# Allegro board A523_REF_LPDDR3_256ball_64X1_6L_V3_1-C0201_0828_1705.brd
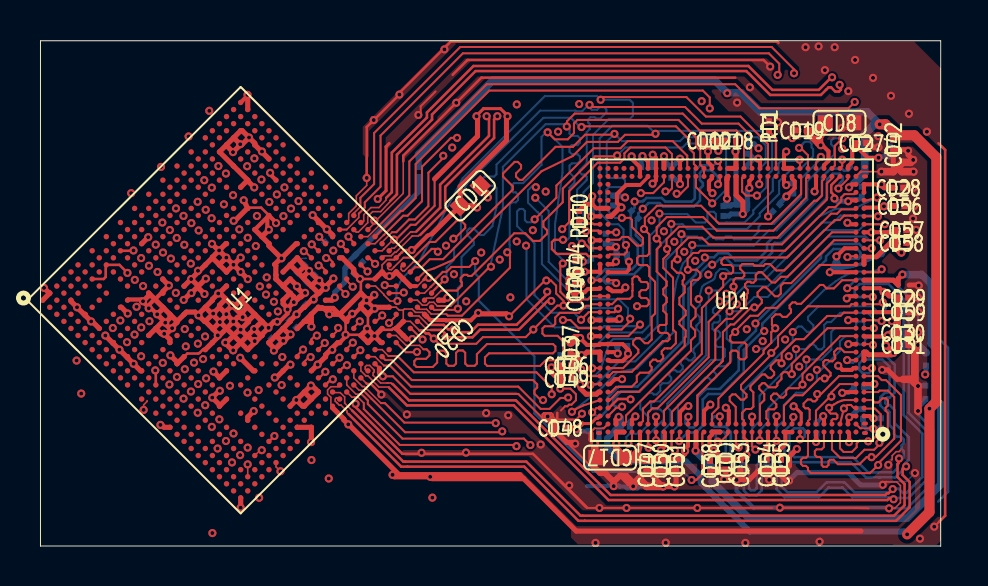
[diagram p0: board, top side]
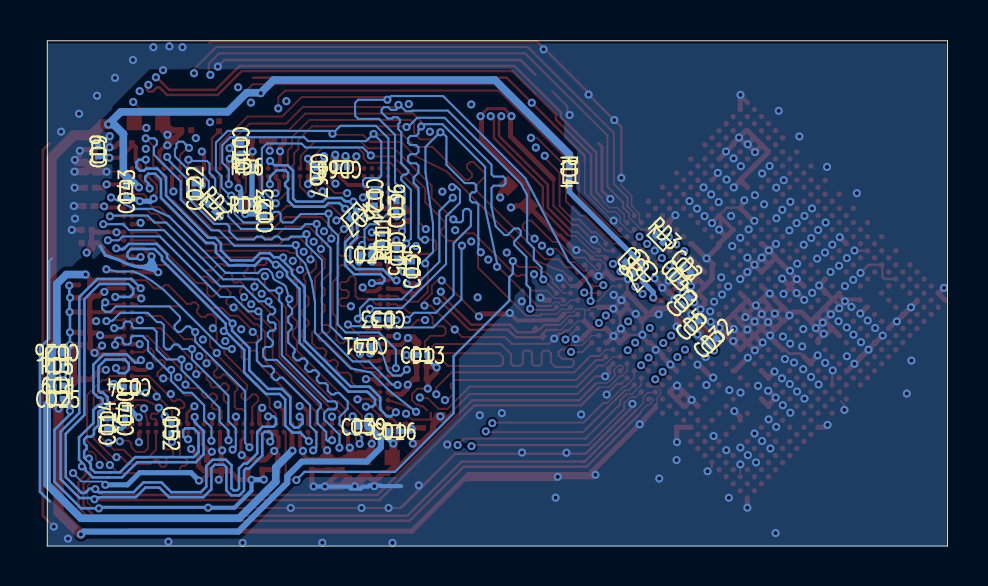
[diagram p1: board, bottom side, seen from below]

Outline 45.01 x 25.3 mm; copper layers: TOP, ART02, ART03, ART04, ART05, BOTTOM. Coordinates in mm from the lower left corner of the outline.
Outline path: 0,25.3 0,0 45.01,0 45.01,25.3 0,25.3

## Design rules (mm)
net group SA: nets SODT0 SODT2

## Placement (name value [footprint] x y rotation side)
CD1  10uF  [C0603]  21.49 17.54 225 top
CD2  2.2uF  [C0201]  13.03 13.87 225 bottom
CD3  NC/2.2uF  [C0201]  13.1 12.27 135 bottom
CD4  100nF  [C0201]  13.53 13.37 225 bottom
CD5  100nF  [C0201]  12.62 11.1 135 bottom
CD6  2.2uF  [C0201]  15.92 14.39 315 bottom
CD7  100nF  [C0201]  15.5 13.83 315 bottom
CD8  10uF  [C0603]  39.95 21.19 0 top
CD9  2.2uF  [C0201]  42.47 19.76 90 bottom
CD10  2.2uF  [C0201]  35.33 19.9 90 bottom
CD11  2.2uF  [C0201]  34.27 4.08 270 top
CD12  2.2uF  [C0201]  33.42 20.3 0 top
CD13  2.2uF  [C0201]  26.26 9.57 180 bottom
CD14  2.2uF  [C0201]  42.03 6.15 270 bottom
CD15  100nF  [C0201]  27.54 14.64 270 bottom
CD16  100nF  [C0201]  27.68 5.75 0 bottom
CD17  10uF  [C0603]  28.48 4.43 180 top
CD18  100nF  [C0201]  34.53 20.3 180 top
CD19  100nF  [C0201]  38.07 20.82 180 top
CD20  NC/2.2pF  [C0201]  20.41 10.67 225 top
CD21  2.2uF  [C0201]  28.64 17.3 90 bottom
CD22  100nF  [C0201]  37.64 17.91 270 bottom
CD23  100nF  [C0201]  34.15 16.78 270 bottom
CD24  2.2uF  [C0201]  29.07 14.59 180 bottom
CD25  100nF  [C0201]  44.49 7.37 180 bottom
CD26  2.2uF  [C0201]  44.53 9.68 180 bottom
CD27  100nF  [C0201]  41.04 20.18 0 top
CD28  100nF  [C0201]  42.89 17.94 0 top
CD29  100nF  [C0201]  43.14 12.43 0 top
CD30  100nF  [C0201]  43.12 10.67 0 top
CD31  100nF  [C0201]  43.14 10.07 0 top
CD32  100nF  [C0201]  11.73 10.22 135 bottom
CD33  100nF  [C0201]  28.22 11.34 0 bottom
CD34  100nF  [C0201]  40.93 7.96 180 bottom
CD35  100nF  [C0201]  26.78 14 90 bottom
CD36  100nF  [C0201]  27.56 17.02 90 bottom
CD37  100nF  [C0201]  26.51 9.92 90 top
CD38  100nF  [C0201]  33.48 4.02 270 top
CD39  100nF  [C0201]  29.22 5.98 0 bottom
CD40  100nF  [C0201]  41.13 6.62 270 bottom
CD41  100nF  [C0201]  29.09 10.02 0 bottom
CD42  100nF  [C0201]  42.64 20.1 270 top
CD43  100nF  [C0201]  41.07 17.74 270 bottom
CD44  100nF  [C0201]  26.75 14.03 90 top
CD45  100nF  [C0201]  26.73 12.86 90 top
CD46  100nF  [C0201]  26.3 9.05 180 top
CD47  100nF  [C0201]  30.29 4.06 270 top
CD48  100nF  [C0201]  25.98 5.92 180 top
CD49  100nF  [C0201]  26.3 8.37 180 top
CD50  100nF  [C0201]  31.01 4.03 270 top
CD51  100nF  [C0201]  31.79 4.06 270 top
CD52  100nF  [C0201]  38.81 5.89 90 bottom
CD53  100nF  [C0201]  35 4.06 270 top
CD54  100nF  [C0201]  36.31 4.06 270 top
CD55  100nF  [C0201]  37.02 4.06 270 top
CD56  100nF  [C0201]  42.95 17.03 0 top
CD57  100nF  [C0201]  43.05 15.83 0 top
CD58  100nF  [C0201]  43.05 15.18 0 top
CD59  100nF  [C0201]  43.14 11.71 0 top
CD67  100nF  [C0201]  31.54 18.69 270 bottom
CD68  100nF  [C0201]  30.28 18.98 0 bottom
NOREF  -  []  45.01 0 90 top
NOREF#2  -  []  0 25.3 0 top
RD1  240R-1%  [R0201]  36.42 21.02 270 top
RD2  240R-1%  [R0201]  36.8 16.93 225 bottom
RD3  120R-1%  [R0201]  14.41 15.38 225 bottom
RD4  NC/0R  [R0201]  18.91 18.73 90 bottom
RD5  2K-1%  [R0201]  44.53 9.03 180 bottom
RD6  2K-1%  [R0201]  35.03 19.01 0 bottom
RD7  100R  [R0201]  29.72 16.6 315 bottom
RD8  2K-1%  [R0201]  35.09 17.09 180 bottom
RD9  2K-1%  [R0201]  44.49 8.03 0 bottom
RD10  240R-1%  [R0201]  26.93 16.52 270 top
RD11  240R-1%  [R0201]  28.27 15.39 90 bottom
U1  A523  [BGA522P50B1500_1500H98]  10.01 12.31 45 top
UD1  LPDDR3-POP256  [BGA256P40B1400_1400H85]  34.58 12.31 180 top

## Library data of the parts
CD1-CD59 CD67 CD68 = C-C0402
RD1-RD11 = R-R0402-1%
U1 = A523/R828-V1: signal model: BGA-15X15-V1_1_15X15_(S1+S2+S3+_BGA-15x15-V1_1
UD1 = LPDDR3-POP256

## Footprints (pads in the part's own frame, mm; a bottom-side part is the same pattern mirrored in y, then rotated)
BGA256P40B1400_1400H85
  oval 0.3x0.2 smd: A1(-6.65,6.65) A34(6.65,6.65) AN1(-6.65,-6.2) AP1(-6.65,-6.676) B1(-6.65,6.174) B34(6.65,6.174)
  round 0.25 smd: A2(-6.2,6.6) A3(-5.8,6.6) A4(-5.4,6.6) A5(-5,6.6) A6(-4.6,6.6) A7(-4.2,6.6) A8(-3.8,6.6) A9(-3.4,6.6) A10(-3,6.6) A11(-2.6,6.6) A12(-2.2,6.6) A13(-1.8,6.6) A14(-1.4,6.6) A15(-1,6.6) A16(-0.6,6.6) A17(-0.2,6.6) A18(0.2,6.6) A19(0.6,6.6) A20(1,6.6) A21(1.4,6.6) A22(1.8,6.6) A23(2.2,6.6) A24(2.6,6.6) A25(3,6.6) A26(3.4,6.6) A27(3.8,6.6) A28(4.2,6.6) A29(4.6,6.6) A30(5,6.6) A31(5.4,6.6) A32(5.8,6.6) A33(6.2,6.6) AA1(-6.6,-1.4) AA2(-6.2,-1.4) AA33(6.2,-1.4) AA34(6.6,-1.4) AB1(-6.6,-1.8) AB2(-6.2,-1.8) AB33(6.2,-1.8) AB34(6.6,-1.8) AC1(-6.6,-2.2) AC2(-6.2,-2.2) AC33(6.2,-2.2) AC34(6.6,-2.2) AD1(-6.6,-2.6) AD2(-6.2,-2.6) AD33(6.2,-2.6) AD34(6.6,-2.6) AE1(-6.6,-3) AE2(-6.2,-3) AE33(6.2,-3) AE34(6.6,-3) AF1(-6.6,-3.4) AF2(-6.2,-3.4) AF33(6.2,-3.4) AF34(6.6,-3.4) AG1(-6.6,-3.8) AG2(-6.2,-3.8) AG33(6.2,-3.8) AG34(6.6,-3.8) AH1(-6.6,-4.2) AH2(-6.2,-4.2) AH33(6.2,-4.2) AH34(6.6,-4.2) AJ1(-6.6,-4.6) AJ2(-6.2,-4.6) AJ33(6.2,-4.6) AJ34(6.6,-4.6) AK1(-6.6,-5) AK2(-6.2,-5) AK33(6.2,-5) AK34(6.6,-5) AL1(-6.6,-5.4) AL2(-6.2,-5.4) AL33(6.2,-5.4) AL34(6.6,-5.4) AM1(-6.6,-5.8) AM2(-6.2,-5.8) AM33(6.2,-5.8) AM34(6.6,-5.8) AN2(-6.2,-6.2) AN3(-5.8,-6.2) AN4(-5.4,-6.2) AN5(-5,-6.2) AN6(-4.6,-6.2) AN7(-4.2,-6.2) AN8(-3.8,-6.2) AN9(-3.4,-6.2) AN10(-3,-6.2) AN11(-2.6,-6.2) AN12(-2.2,-6.2) AN13(-1.8,-6.2) AN14(-1.4,-6.2) AN15(-1,-6.2) AN16(-0.6,-6.2) AN17(-0.2,-6.2) AN18(0.2,-6.2) AN19(0.6,-6.2) AN20(1,-6.2) AN21(1.4,-6.2) AN22(1.8,-6.2) AN23(2.2,-6.2) AN24(2.6,-6.2) AN25(3,-6.2) AN26(3.4,-6.2) AN27(3.8,-6.2) AN28(4.2,-6.2) AN29(4.6,-6.2) AN30(5,-6.2) AN31(5.4,-6.2) AN32(5.8,-6.2) AN33(6.2,-6.2) AN34(6.6,-6.2) AP2(-6.2,-6.6) AP3(-5.8,-6.6) AP4(-5.4,-6.6) AP5(-5,-6.6) AP6(-4.6,-6.6) AP7(-4.2,-6.6) AP8(-3.8,-6.6) AP9(-3.4,-6.6) AP10(-3,-6.6) AP11(-2.6,-6.6) AP12(-2.2,-6.6) AP13(-1.8,-6.6) AP14(-1.4,-6.6) AP15(-1,-6.6) AP16(-0.6,-6.6) AP17(-0.2,-6.6) AP18(0.2,-6.6) AP19(0.6,-6.6) AP20(1,-6.6) AP21(1.4,-6.6) AP22(1.8,-6.6) AP23(2.2,-6.6) AP24(2.6,-6.6) AP25(3,-6.6) AP26(3.4,-6.6) AP27(3.8,-6.6) AP28(4.2,-6.6) AP29(4.6,-6.6) AP30(5,-6.6) AP31(5.4,-6.6) AP32(5.8,-6.6) AP33(6.2,-6.6) AP34(6.6,-6.6) B2(-6.2,6.2) B3(-5.8,6.2) B4(-5.4,6.2) B5(-5,6.2) B6(-4.6,6.2) B7(-4.2,6.2) B8(-3.8,6.2) B9(-3.4,6.2) B10(-3,6.2) B11(-2.6,6.2) B12(-2.2,6.2) B13(-1.8,6.2) B14(-1.4,6.2) B15(-1,6.2) B16(-0.6,6.2) B17(-0.2,6.2) B18(0.2,6.2) B19(0.6,6.2) B20(1,6.2) B21(1.4,6.2) B22(1.8,6.2) B23(2.2,6.2) B24(2.6,6.2) B25(3,6.2) B26(3.4,6.2) B27(3.8,6.2) B28(4.2,6.2) B29(4.6,6.2) B30(5,6.2) B31(5.4,6.2) B32(5.8,6.2) B33(6.2,6.2) C1(-6.6,5.8) C2(-6.2,5.8) C33(6.2,5.8) C34(6.6,5.8) D1(-6.6,5.4) D2(-6.2,5.4) D33(6.2,5.4) D34(6.6,5.4) E1(-6.6,5) E2(-6.2,5) E33(6.2,5) E34(6.6,5) F1(-6.6,4.6) F2(-6.2,4.6) F33(6.2,4.6) F34(6.6,4.6) G1(-6.6,4.2) G2(-6.2,4.2) G33(6.2,4.2) G34(6.6,4.2) H1(-6.6,3.8) H2(-6.2,3.8) H33(6.2,3.8) H34(6.6,3.8) J1(-6.6,3.4) J2(-6.2,3.4) J33(6.2,3.4) J34(6.6,3.4) K1(-6.6,3) K2(-6.2,3) K33(6.2,3) K34(6.6,3) L1(-6.6,2.6) L2(-6.2,2.6) L33(6.2,2.6) L34(6.6,2.6) M1(-6.6,2.2) M2(-6.2,2.2) M33(6.2,2.2) M34(6.6,2.2) N1(-6.6,1.8) N2(-6.2,1.8) N33(6.2,1.8) N34(6.6,1.8) P1(-6.6,1.4) P2(-6.2,1.4) P33(6.2,1.4) P34(6.6,1.4) R1(-6.6,1) R2(-6.2,1) R33(6.2,1) R34(6.6,1) T1(-6.6,0.6) T2(-6.2,0.6) T33(6.2,0.6) T34(6.6,0.6) U1(-6.6,0.2) U2(-6.2,0.2) U33(6.2,0.2) U34(6.6,0.2) V1(-6.6,-0.2) V2(-6.2,-0.2) V33(6.2,-0.2) V34(6.6,-0.2) W1(-6.6,-0.6) W2(-6.2,-0.6) W33(6.2,-0.6) W34(6.6,-0.6) Y1(-6.6,-1) Y2(-6.2,-1) Y33(6.2,-1) Y34(6.6,-1)
BGA522P50B1500_1500H98
  round 0.27 smd: A1(-7,7) A2(-6.5,7) A3(-6,7) A4(-5.5,7) A5(-5,7) A6(-4.5,7) A8(-3.5,7) A10(-2.5,7) A12(-1.5,7) A14(-0.5,7) A16(0.5,7) A18(1.5,7) A20(2.5,7) A22(3.5,7) A24(4.5,7) A25(5,7) A26(5.5,7) A27(6,7) A28(6.5,7) A29(7,7) AA1(-7,-3) AA2(-6.5,-3) AA3(-6,-3) AA4(-5.5,-3) AA5(-5,-3) AA6(-4.5,-3) AA7(-4,-3) AA9(-3,-3) AA10(-2.5,-3) AA11(-2,-3) AA12(-1.5,-3) AA17(1,-3) AA18(1.5,-3) AA19(2,-3) AA20(2.5,-3) AA21(3,-3) AA23(4,-3) AA24(4.5,-3) AA25(5,-3) AA26(5.5,-3) AA27(6,-3) AA28(6.5,-3) AA29(7,-3) AB1(-7,-3.5) AB2(-6.5,-3.5) AB13(-1,-3.5) AB28(6.5,-3.5) AB29(7,-3.5) AC1(-7,-4) AC2(-6.5,-4) AC3(-6,-4) AC4(-5.5,-4) AC5(-5,-4) AC7(-4,-4) AC9(-3,-4) AC11(-2,-4) AC13(-1,-4) AC15(0,-4) AC17(1,-4) AC19(2,-4) AC21(3,-4) AC24(4.5,-4) AC25(5,-4) AC26(5.5,-4) AC27(6,-4) AC28(6.5,-4) AC29(7,-4) AD1(-7,-4.5) AD2(-6.5,-4.5) AD7(-4,-4.5) AD9(-3,-4.5) AD11(-2,-4.5) AD13(-1,-4.5) AD15(0,-4.5) AD17(1,-4.5) AD19(2,-4.5) AD21(3,-4.5) AD23(4,-4.5) AD28(6.5,-4.5) AD29(7,-4.5) AE1(-7,-5) AE2(-6.5,-5) AE3(-6,-5) AE4(-5.5,-5) AE5(-5,-5) AE7(-4,-5) AE9(-3,-5) AE11(-2,-5) AE13(-1,-5) AE15(0,-5) AE17(1,-5) AE19(2,-5) AE21(3,-5) AE23(4,-5) AE26(5.5,-5) AE27(6,-5) AE28(6.5,-5) AE29(7,-5) AF1(-7,-5.5) AF2(-6.5,-5.5) AF7(-4,-5.5) AF9(-3,-5.5) AF11(-2,-5.5) AF13(-1,-5.5) AF15(0,-5.5) AF17(1,-5.5) AF19(2,-5.5) AF21(3,-5.5) AF23(4,-5.5) AF25(5,-5.5) AF28(6.5,-5.5) AF29(7,-5.5) AG1(-7,-6) AG2(-6.5,-6) AG3(-6,-6) AG5(-5,-6) AG7(-4,-6) AG9(-3,-6) AG10(-2.5,-6) AG11(-2,-6) AG12(-1.5,-6) AG13(-1,-6) AG14(-0.5,-6) AG15(0,-6) AG17(1,-6) AG19(2,-6) AG21(3,-6) AG23(4,-6) AG25(5,-6) AG27(6,-6) AG28(6.5,-6) AG29(7,-6) AH1(-7,-6.5) AH2(-6.5,-6.5) AH3(-6,-6.5) AH4(-5.5,-6.5) AH5(-5,-6.5) AH6(-4.5,-6.5) AH7(-4,-6.5) AH8(-3.5,-6.5) AH9(-3,-6.5) AH10(-2.5,-6.5) AH11(-2,-6.5) AH12(-1.5,-6.5) AH13(-1,-6.5) AH14(-0.5,-6.5) AH15(0,-6.5) AH16(0.5,-6.5) AH17(1,-6.5) AH18(1.5,-6.5) AH19(2,-6.5) AH20(2.5,-6.5) AH21(3,-6.5) AH22(3.5,-6.5) AH23(4,-6.5) AH24(4.5,-6.5) AH25(5,-6.5) AH26(5.5,-6.5) AH27(6,-6.5) AH28(6.5,-6.5) AH29(7,-6.5) AJ1(-7,-7) AJ2(-6.5,-7) AJ3(-6,-7) AJ4(-5.5,-7) AJ5(-5,-7) AJ6(-4.5,-7) AJ7(-4,-7) AJ8(-3.5,-7) AJ9(-3,-7) AJ11(-2,-7) AJ13(-1,-7) AJ15(0,-7) AJ16(0.5,-7) AJ17(1,-7) AJ18(1.5,-7) AJ19(2,-7) AJ20(2.5,-7) AJ21(3,-7) AJ22(3.5,-7) AJ23(4,-7) AJ24(4.5,-7) AJ25(5,-7) AJ26(5.5,-7) AJ27(6,-7) AJ28(6.5,-7) AJ29(7,-7) B1(-7,6.5) B2(-6.5,6.5) B3(-6,6.5) B4(-5.5,6.5) B5(-5,6.5) B6(-4.5,6.5) B7(-4,6.5) B8(-3.5,6.5) B9(-3,6.5) B10(-2.5,6.5) B11(-2,6.5) B12(-1.5,6.5) B13(-1,6.5) B14(-0.5,6.5) B15(0,6.5) B16(0.5,6.5) B17(1,6.5) B18(1.5,6.5) B19(2,6.5) B20(2.5,6.5) B21(3,6.5) B22(3.5,6.5) B23(4,6.5) B24(4.5,6.5) B25(5,6.5) B26(5.5,6.5) B27(6,6.5) B28(6.5,6.5) B29(7,6.5) C1(-7,6) C2(-6.5,6) C3(-6,6) C4(-5.5,6) C5(-5,6) C6(-4.5,6) C7(-4,6) C8(-3.5,6) C9(-3,6) C10(-2.5,6) C11(-2,6) C12(-1.5,6) C13(-1,6) C14(-0.5,6) C15(0,6) C16(0.5,6) C17(1,6) C18(1.5,6) C19(2,6) C20(2.5,6) C21(3,6) C22(3.5,6) C23(4,6) C24(4.5,6) C25(5,6) C26(5.5,6) C27(6,6) C28(6.5,6) C29(7,6) D1(-7,5.5) D2(-6.5,5.5) D6(-4.5,5.5) D8(-3.5,5.5) D10(-2.5,5.5) D12(-1.5,5.5) D14(-0.5,5.5) D16(0.5,5.5) D18(1.5,5.5) D20(2.5,5.5) D22(3.5,5.5) D28(6.5,5.5) D29(7,5.5) E1(-7,5) E2(-6.5,5) E3(-6,5) E4(-5.5,5) E5(-5,5) E6(-4.5,5) E8(-3.5,5) E10(-2.5,5) E12(-1.5,5) E14(-0.5,5) E16(0.5,5) E18(1.5,5) E20(2.5,5) E22(3.5,5) E24(4.5,5) E25(5,5) E26(5.5,5) E27(6,5) E28(6.5,5) E29(7,5) F1(-7,4.5) F2(-6.5,4.5) F8(-3.5,4.5) F10(-2.5,4.5) F12(-1.5,4.5) F14(-0.5,4.5) F16(0.5,4.5) F18(1.5,4.5) F20(2.5,4.5) F22(3.5,4.5) F28(6.5,4.5) F29(7,4.5) G1(-7,4) G2(-6.5,4) G3(-6,4) G4(-5.5,4) G5(-5,4) G6(-4.5,4) G7(-4,4) G23(4,4) G24(4.5,4) G25(5,4) G26(5.5,4) G27(6,4) G28(6.5,4) G29(7,4) H1(-7,3.5) H2(-6.5,3.5) H9(-3,3.5) H10(-2.5,3.5) H11(-2,3.5) H12(-1.5,3.5) H13(-1,3.5) H14(-0.5,3.5) H15(0,3.5) H16(0.5,3.5) H17(1,3.5) H18(1.5,3.5) H19(2,3.5) H20(2.5,3.5) H21(3,3.5) H27(6,3.5) H28(6.5,3.5) J1(-7,3) J2(-6.5,3) J3(-6,3) J4(-5.5,3) J5(-5,3) J6(-4.5,3) J7(-4,3) J10(-2.5,3) J12(-1.5,3) J13(-1,3) J15(0,3) J16(0.5,3) J18(1.5,3) J19(2,3) J22(3.5,3) J23(4,3) J24(4.5,3) J25(5,3) J26(5.5,3) J27(6,3) J28(6.5,3) J29(7,3) K1(-7,2.5) K2(-6.5,2.5) K9(-3,2.5) K10(-2.5,2.5) K12(-1.5,2.5) K15(0,2.5) K16(0.5,2.5) K18(1.5,2.5) K19(2,2.5) K21(3,2.5) K27(6,2.5) K28(6.5,2.5) L1(-7,2) L2(-6.5,2) L3(-6,2) L4(-5.5,2) L5(-5,2) L6(-4.5,2) L7(-4,2) L9(-3,2) L10(-2.5,2) L13(-1,2) L15(0,2) L16(0.5,2) L18(1.5,2) L19(2,2) L21(3,2) L23(4,2) L24(4.5,2) L25(5,2) L26(5.5,2) L27(6,2) L28(6.5,2) L29(7,2) M1(-7,1.5) M2(-6.5,1.5) M9(-3,1.5) M10(-2.5,1.5) M12(-1.5,1.5) M14(-0.5,1.5) M15(0,1.5) M16(0.5,1.5) M19(2,1.5) M21(3,1.5) M27(6,1.5) M28(6.5,1.5) N1(-7,1) N2(-6.5,1) N3(-6,1) N4(-5.5,1) N5(-5,1) N6(-4.5,1) N7(-4,1) N8(-3.5,1) N10(-2.5,1) N12(-1.5,1) N13(-1,1) N15(0,1) N16(0.5,1) N18(1.5,1) N19(2,1) N21(3,1) N22(3.5,1) N23(4,1) N24(4.5,1) N25(5,1) N26(5.5,1) N27(6,1) N28(6.5,1) N29(7,1) P2(-6.5,0.5) P3(-6,0.5) P9(-3,0.5) P10(-2.5,0.5) P11(-2,0.5) P13(-1,0.5) P15(0,0.5) P16(0.5,0.5) P18(1.5,0.5) P19(2,0.5) P27(6,0.5) P28(6.5,0.5) R1(-7,0) R2(-6.5,0) R3(-6,0) R4(-5.5,0) R5(-5,0) R6(-4.5,0) R7(-4,0) R15(0,0) R16(0.5,0) R23(4,0) R24(4.5,0) R25(5,0) R26(5.5,0) R27(6,0) R28(6.5,0) R29(7,0) T2(-6.5,-0.5) T3(-6,-0.5) T9(-3,-0.5) T10(-2.5,-0.5) T12(-1.5,-0.5) T13(-1,-0.5) T16(0.5,-0.5) T18(1.5,-0.5) T19(2,-0.5) T20(2.5,-0.5) T21(3,-0.5) T22(3.5,-0.5) T27(6,-0.5) T28(6.5,-0.5) U1(-7,-1) U2(-6.5,-1) U3(-6,-1) U4(-5.5,-1) U5(-5,-1) U6(-4.5,-1) U7(-4,-1) U9(-3,-1) U10(-2.5,-1) U12(-1.5,-1) U15(0,-1) U16(0.5,-1) U18(1.5,-1) U19(2,-1) U20(2.5,-1) U21(3,-1) U23(4,-1) U24(4.5,-1) U25(5,-1) U26(5.5,-1) U27(6,-1) U28(6.5,-1) U29(7,-1) V2(-6.5,-1.5) V3(-6,-1.5) V9(-3,-1.5) V10(-2.5,-1.5) V12(-1.5,-1.5) V13(-1,-1.5) V15(0,-1.5) V16(0.5,-1.5) V18(1.5,-1.5) V19(2,-1.5) V21(3,-1.5) V28(6.5,-1.5) V29(7,-1.5) W1(-7,-2) W2(-6.5,-2) W3(-6,-2) W4(-5.5,-2) W5(-5,-2) W6(-4.5,-2) W7(-4,-2) W8(-3.5,-2) W9(-3,-2) W10(-2.5,-2) W12(-1.5,-2) W14(-0.5,-2) W21(3,-2) W23(4,-2) W24(4.5,-2) W25(5,-2) W26(5.5,-2) W27(6,-2) W28(6.5,-2) W29(7,-2) Y1(-7,-2.5) Y2(-6.5,-2.5) Y12(-1.5,-2.5) Y14(-0.5,-2.5) Y15(0,-2.5) Y16(0.5,-2.5) Y17(1,-2.5) Y19(2,-2.5) Y21(3,-2.5) Y28(6.5,-2.5) Y29(7,-2.5)
C0201
  rect 0.3x0.3 smd: 1(-0.25,0) 2(0.25,0)
C0603
  rect 0.76x0.76 smd: 1(-0.71,0) 2(0.71,0)
R0201
  rect 0.3x0.3 smd: 1(-0.25,0) 2(0.25,0)

## Nets
GND: CD1.2 CD2.2 CD3.2 CD4.2 CD5.2 CD6.2 CD7.2 CD8.2 CD9.2 CD10.2 CD11.2 CD12.2 CD13.2 CD14.2 CD15.2 CD16.2 CD17.2 CD18.2 CD19.2 CD21.2 CD22.2 CD23.2 CD24.2 CD25.2 CD26.2 CD27.2 CD28.2 CD29.2 CD30.2 CD31.2 CD32.2 CD33.2 CD34.2 CD35.2 CD36.2 CD37.2 CD38.2 CD39.2 CD40.2 CD41.2 CD42.2 CD43.2 CD44.2 CD45.2 CD46.2 CD47.2 CD48.2 CD49.2 CD50.2 CD51.2 CD52.2 CD53.2 CD54.2 CD55.2 CD56.2 CD57.2 CD58.2 CD59.2 CD67.2 CD68.2 RD1.1 RD2.1 RD3.1 RD8.1 RD9.1 RD10.1 RD11.1 U1.A1(GND0) U1.A2(GND1) U1.A29(GND2) U1.AA6(GND83) U1.AA7(GND84) U1.AA11(GND85) U1.AA17(GND86) U1.AA18(GND87) U1.AA19(GND88) U1.AA20(GND89) U1.AA25(GND90) U1.AA28(GND91) U1.AC13(GND92) U1.AC21(GND93) U1.AC24(GND94) U1.AC26(SA1) U1.AC27(GND95) U1.AC29(GND96) U1.AD7(GND97) U1.AD21(SA4) U1.AD23(GND98) U1.AD28(GND99) U1.AE15(GND100) U1.AE17(GND101) U1.AE19(GND102) U1.AE23(SA16) U1.AE28(SA11) U1.AF11(GND103) U1.AF13(GND104) U1.AF21(SBA0) U1.AF25(SA13) U1.AF28(GND105) U1.AG5(GND106) U1.AG7(GND107) U1.AG12(GND108) U1.AG13(GND109) U1.AG14(GND110) U1.AG21(SA8) U1.AG23(SA3) U1.AH3(GND111) U1.AH10(GND112) U1.AH16(GND113) U1.AH22(GND114) U1.AH24(SA14) U1.AH25(GND115) U1.AJ1(GND116) U1.AJ6(GND117) U1.AJ11(GND118) U1.AJ18(GND119) U1.AJ20(GND120) U1.AJ24(GND121) U1.AJ27(GND122) U1.AJ29(GND123) U1.B29(GND3) U1.C3(GND4) U1.C6(GND5) U1.C8(GND6) U1.C10(GND7) U1.C24(GND8) U1.C25(GND9) U1.C26(GND10) U1.C27(GND11) U1.D12(GND12) U1.E3(GND13) U1.E24(GND14) U1.E27(GND15) U1.G3(GND16) U1.G6(GND17) U1.G7(GND18) U1.G23(GND19) U1.G24(GND20) U1.G27(GND21) U1.H9(GND22) U1.H11(GND23) U1.J3(GND24) U1.J10(GND25) U1.J22(GND26) U1.J26(GND27) U1.K9(GND28) U1.K12(GND29) U1.K15(GND30) U1.K16(GND31) U1.K18(GND32) U1.L3(GND33) U1.L6(GND34) U1.L7(GND35) U1.L9(GND36) U1.L13(GND37) U1.L16(GND38) U1.L21(GND39) U1.L23(GND40) U1.M9(GND41) U1.M10(GND42) U1.M16(GND43) U1.M21(GND44) U1.N3(GND45) U1.N7(GND46) U1.N12(GND47) U1.N13(GND48) U1.N15(GND49) U1.N21(GND50) U1.P11(GND51) U1.P13(GND52) U1.R3(GND53) U1.R6(GND54) U1.R7(GND55) U1.R15(GND56) U1.R16(GND57) U1.R23(GND58) U1.R26(GND59) U1.T9(GND60) U1.T10(GND61) U1.T12(GND62) U1.T13(GND63) U1.T19(GND64) U1.U12(GND65) U1.U15(GND66) U1.U19(GND67) U1.U20(GND68) U1.U26(GND69) U1.U28(GND70) U1.V12(GND71) U1.V13(GND72) U1.V15(GND73) U1.V18(GND74) U1.V19(GND75) U1.W1(GND76) U1.W8(GND77) U1.W9(GND78) U1.W12(GND79) U1.W14(GND80) U1.W25(GND81) U1.W29(GND82) UD1.AA2(VSS_24) UD1.AB33(VSS_25) UD1.AD2(VSS_26) UD1.AD33(VSS_27) UD1.AG2(VSS_28) UD1.AJ33(VSS_29) UD1.AJ34(VSS_30) UD1.AK2(VSS_31) UD1.AN2(VSS_32) UD1.AN4(VSS_33) UD1.AN7(VSS_34) UD1.AN10(VSS_35) UD1.AN15(VSS_36) UD1.AN17(VSS_37) UD1.AN20(VSS_38) UD1.AN24(VSS_39) UD1.AN27(VSS_40) UD1.AN29(VSS_41) UD1.AP27(VSS_42) UD1.AP29(VSS_43) UD1.B2(VSS_1) UD1.B6(VSS_2) UD1.B9(VSS_3) UD1.B12(VSS_4) UD1.B15(VSS_5) UD1.B18(VSS_6) UD1.B21(VSS_7) UD1.B24(VSS_8) UD1.B27(VSS_9) UD1.B30(VSS_10) UD1.B33(VSS_11) UD1.D33(VSS_12) UD1.F2(VSS_13) UD1.G33(VSS_14) UD1.J2(VSS_15) UD1.K33(VSS_16) UD1.M2(VSS_17) UD1.M33(VSS_18) UD1.M34(VSS_19) UD1.R2(VSS_20) UD1.R33(VSS_21) UD1.V2(VSS_22) UD1.W33(VSS_23)
VCC-DRAM: CD1.1 CD2.1 CD3.1 CD4.1 CD5.1 CD8.1 CD9.1 CD10.1 CD11.1 CD12.1 CD13.1 CD14.1 CD15.1 CD16.1 CD17.1 CD18.1 CD19.1 CD27.1 CD28.1 CD29.1 CD30.1 CD31.1 CD32.1 CD33.1 CD34.1 CD35.1 CD36.1 CD37.1 CD38.1 CD44.1 CD45.1 CD46.1 CD47.1 CD48.1 CD49.1 CD50.1 CD51.1 CD52.1 CD53.1 CD54.1 CD55.1 CD56.1 CD57.1 CD58.1 CD59.1 CD67.1 CD68.1 RD5.2 RD6.2 U1.T20(VCC-DRAM0) U1.T21(VCC-DRAM1) U1.T22(VCC-DRAM2) U1.U21(VCC-DRAM3) U1.V21(VCC-DRAM4) U1.W21(VCC-DRAM5) U1.Y14(VCC-DRAML0) U1.Y15(VCC-DRAML1) U1.Y16(VCC-DRAML2) U1.Y17(VCC-DRAML3) U1.Y19(VCC-DRAML4) U1.Y21(VCC-DRAM6) UD1.A3(VDD2_1) UD1.A7(VDDQ_1) UD1.A10(VDDQ_2) UD1.A11(VDD2_2) UD1.A13(VDDQ_3) UD1.A16(VDDQ_4) UD1.A19(VDDQ_5) UD1.A20(VDD2_3) UD1.A23(VDDQ_6) UD1.A26(VDDQ_7) UD1.A29(VDDQ_8) UD1.A31(VDDQ_9) UD1.A32(VDD2_4) UD1.AA34(VDD2_9) UD1.AB1(VDD2_10) UD1.AB34(VDDCA_3) UD1.AC1(VDDQ_18) UD1.AE34(VDDCA_4) UD1.AF1(VDDQ_19) UD1.AH34(VDD2_11) UD1.AJ1(VDDQ_20) UD1.AL1(VDDQ_21) UD1.AM1(VDD2_12) UD1.AP3(VDDQ_22) UD1.AP6(VDDQ_23) UD1.AP10(VDDQ_24) UD1.AP11(VDD2_13) UD1.AP14(VDDCA_5) UD1.AP17(VDDCA_6) UD1.AP18(VDD2_14) UD1.AP20(VDDCA_7) UD1.AP24(VDD2_15) UD1.AP26(VDDCA_8) UD1.AP28(VDD2_16) UD1.C1(VDD2_5) UD1.C34(VDDQ_10) UD1.F34(VDDQ_11) UD1.G1(VDDQ_12) UD1.K1(VDDQ_13) UD1.K34(VDDQ_14) UD1.L1(VDD2_6) UD1.L34(VDD2_7) UD1.N1(VDDQ_15) UD1.N34(VDDCA_1) UD1.R34(VDD2_8) UD1.T1(VDDQ_16) UD1.W1(VDDQ_17) UD1.W34(VDDCA_2)
VDD18-DRAM: CD6.1 CD7.1 RD4.1 U1.AA21(VDD18-DRAM)
VDD18-LPDDR: CD21.1 CD22.1 CD39.1 CD40.1 CD41.1 CD42.1 CD43.1 RD4.2 UD1.AH33(VDD1_5) UD1.AM2(VDD1_6) UD1.AN11(VDD1_7) UD1.AN28(VDD1_8) UD1.B3(VDD1_1) UD1.B32(VDD1_2) UD1.C2(VDD1_3) UD1.L33(VDD1_4)
SA0: U1.AJ23(SA6) UD1.AN26(CA0_A) UD1.N33(CA0_B)
SA1: U1.AJ25(SA15) UD1.AP25(CA1_A) UD1.P34(CA1_B)
SA2: U1.AE26(SA17) UD1.AN25(CA2_A) UD1.P33(CA2_B)
SA3: U1.AF23(SA5) UD1.AP23(CA3_A) UD1.T34(CA3_B)
SA4: U1.AE27(SA9) UD1.AN23(CA4_A) UD1.T33(CA4_B)
SA5: U1.AG27(SA12) UD1.AC34(CA5_B) UD1.AP16(CA5_A)
SA6: U1.AF29(SA0) UD1.AC33(CA6_B) UD1.AN16(CA6_A)
SA7: U1.AH29(SA7) UD1.AD34(CA7_B) UD1.AP15(CA7_A)
SA8: U1.AE29(SA2) UD1.AE33(CA8_B) UD1.AN14(CA8_A)
SA9: U1.AC25(SA10) UD1.AF34(CA9_B) UD1.AP13(CA9_A)
SCKE0: U1.AH27(SCKE0) UD1.AN21(CKE1_A) UD1.AP21(CKE0_A) UD1.V33(CKE1_B) UD1.V34(CKE0_B)
SCKN: CD20.2 RD7.2 U1.AJ26(SCKN) UD1.AN19(CK_C_A) UD1.Y33(CK_C_B)
SCKP: CD20.1 RD7.1 U1.AH26(SCKP) UD1.AP19(CK_T_A) UD1.Y34(CK_T_B)
SCS0: U1.AJ28(SCS0) UD1.AP22(CS0_N_A)
SCS1: U1.AH28(SCS1) UD1.AN22(CS1_N_A)
SCS2: U1.AH23(SBG1) UD1.U34(CS0_N_B)
SCS3: U1.AG25(SACT) UD1.U33(CS1_N_B)
SDQ0: U1.AA24(SDQ0) UD1.AN6(DQ26_B) UD1.F33(DQ21_A)
SDQ1: U1.AA23(SDQ1) UD1.AP5(DQ24_B) UD1.E34(DQ23_A)
SDQ2: U1.AC28(SDQ2) UD1.AN9(DQ31_B) UD1.J33(DQ16_A)
SDQ3: U1.AD29(SDQ3) UD1.AP9(DQ30_B) UD1.J34(DQ17_A)
SDQ4: U1.AA26(SDQ4) UD1.AP8(DQ28_B) UD1.H34(DQ19_A)
SDQ5: U1.Y28(SDQ5) UD1.AP7(DQ27_B) UD1.G34(DQ20_A)
SDQ6: U1.AA27(SDQ6) UD1.AN8(DQ29_B) UD1.H33(DQ18_A)
SDQ7: U1.Y29(SDQ7) UD1.AN5(DQ25_B) UD1.E33(DQ22_A)
SDQ8: U1.W23(SDQ8) UD1.A30(DQ0_A) UD1.AK1(DQ15_B)
SDQ9: U1.W24(SDQ9) UD1.AJ2(DQ14_B) UD1.B29(DQ1_A)
SDQ10: U1.W26(SDQ10) UD1.A27(DQ4_A) UD1.AG1(DQ11_B)
SDQ11: U1.W27(SDQ11) UD1.A28(DQ3_A) UD1.AH1(DQ12_B)
SDQ12: U1.U29(SDQ12) UD1.AF2(DQ10_B) UD1.B26(DQ5_A)
SDQ13: U1.U27(SDQ13) UD1.AH2(DQ13_B) UD1.B28(DQ2_A)
SDQ14: U1.U24(SDQ14) UD1.AE2(DQ9_B) UD1.B25(DQ6_A)
SDQ15: U1.U23(SDQ15) UD1.A25(DQ7_A) UD1.AE1(DQ8_B)
SDQ16: U1.AH21(SDQ16) UD1.B14(DQ13_A) UD1.P2(DQ2_B)
SDQ17: U1.AJ21(SDQ17) UD1.A14(DQ12_A) UD1.P1(DQ3_B)
SDQ18: U1.AD19(SDQ18) UD1.A17(DQ8_A) UD1.U1(DQ7_B)
SDQ19: U1.AF19(SDQ19) UD1.B17(DQ9_A) UD1.U2(DQ6_B)
SDQ20: U1.AG19(SDQ20) UD1.A15(DQ11_A) UD1.R1(DQ4_B)
SDQ21: U1.AH18(SDQ21) UD1.B13(DQ14_A) UD1.N2(DQ1_B)
SDQ22: U1.AJ17(SDQ22) UD1.A12(DQ15_A) UD1.M1(DQ0_B)
SDQ23: U1.AC17(SDQ23) UD1.B16(DQ10_A) UD1.T2(DQ5_B)
SDQ24: U1.AC15(SDQ24) UD1.A4(DQ30_A) UD1.D1(DQ17_B)
SDQ25: U1.AD15(SDQ25) UD1.A5(DQ28_A) UD1.E1(DQ19_B)
SDQ26: U1.AF15(SDQ26) UD1.A6(DQ27_A) UD1.F1(DQ20_B)
SDQ27: U1.AG15(SDQ27) UD1.A8(DQ24_A) UD1.H1(DQ23_B)
SDQ28: U1.AH17(SDQ28) UD1.B8(DQ25_A) UD1.H2(DQ22_B)
SDQ29: U1.AG17(SDQ29) UD1.B4(DQ31_A) UD1.D2(DQ16_B)
SDQ30: U1.AF17(SDQ30) UD1.B7(DQ26_A) UD1.G2(DQ21_B)
SDQ31: U1.AD17(SDQ31) UD1.B5(DQ29_A) UD1.E2(DQ18_B)
SDQM0: U1.AA29(SDQM0) UD1.AL2(DM3_B) UD1.B31(DM2_A)
SDQM1: U1.W28(SDQM1) UD1.AB2(DM1_B) UD1.B22(DM0_A)
SDQM2: U1.AH20(SDQM2) UD1.B20(DM1_A) UD1.Y2(DM0_B)
SDQM3: U1.AJ16(SDQM3) UD1.B11(DM3_A) UD1.L2(DM2_B)
SDQS0N: U1.AB29(SDQS0N) UD1.AN3(DQS3_C_B) UD1.C33(DQS2_C_A)
SDQS0P: U1.AB28(SDQS0P) UD1.AP4(DQS3_T_B) UD1.D34(DQS2_T_A)
SDQS1N: U1.V29(SDQS1N) UD1.A24(DQS0_C_A) UD1.AC2(DQS1_C_B)
SDQS1P: U1.V28(SDQS1P) UD1.AD1(DQS1_T_B) UD1.B23(DQS0_T_A)
SDQS2N: U1.AJ19(SDQS2N) UD1.B19(DQS1_C_A) UD1.V1(DQS0_C_B)
SDQS2P: U1.AH19(SDQS2P) UD1.A18(DQS1_T_A) UD1.W2(DQS0_T_B)
SDQS3N: U1.AJ15(SDQS3N) UD1.B10(DQS3_C_A) UD1.K2(DQS2_C_B)
SDQS3P: U1.AH15(SDQS3P) UD1.A9(DQS3_T_A) UD1.J1(DQS2_T_B)
SODT0: U1.AG28(SODT0) UD1.A21(ODT_A)
SODT2: U1.AE21(SBA1) UD1.AA1(ODT_B)
SVREF: CD23.1 CD24.1 RD6.1 RD8.2 UD1.AA33(VREF(CA)_B) UD1.AN18(VREF(CA)_A)
VREFDQ: CD25.1 CD26.1 RD5.1 RD9.2 UD1.A22(VREF(DQ)_A) UD1.Y1(VREF(DQ)_B)
N186294: RD3.2 U1.U25(SZQ)
N16555902: RD1.2 UD1.AP12(ZQ1_A/NC)
N16555906: RD2.2 UD1.AN13(ZQ0_A)
N16558013: RD10.2 UD1.AG34(ZQ1_B/NC)
N16558017: RD11.2 UD1.AF33(ZQ0_B)

Pads without a net: U1 A3 A4 A5 A6 A8 A10 A12 A14 A16 A18 A20 A22 A24 A25 A26 A27 A28 AA1 AA2 AA3 AA4 AA5 AA9 AA10 AA12 AB1 AB2 AB13 AC1 AC2 AC3 AC4 AC5 AC7 AC9 AC11 AC19 AD1 AD2 AD9 AD11 AD13 AE1 AE2 AE3 AE4 AE5 AE7 AE9 AE11 AE13 AF1 AF2 AF7 AF9 AG1 AG2 AG3 AG9 AG10 AG11 AG29 AH1 AH2 AH4 AH5 AH6 AH7 AH8 AH9 AH11 AH12 AH13 AH14 AJ2 AJ3 AJ4 AJ5 AJ7 AJ8 AJ9 AJ13 AJ22 B1 B2 B3 B4 B5 B6 B7 B8 B9 B10 B11 B12 B13 B14 B15 B16 B17 B18 B19 B20 B21 B22 B23 B24 B25 B26 B27 B28 C1 C2 C4 C5 C7 C9 C11 C12 C13 C14 C15 C16 C17 C18 C19 C20 C21 C22 C23 C28 C29 D1 D2 D6 D8 D10 D14 D16 D18 D20 D22 D28 D29 E1 E2 E4 E5 E6 E8 E10 E12 E14 E16 E18 E20 E22 E25 E26 E28 E29 F1 F2 F8 F10 F12 F14 F16 F18 F20 F22 F28 F29 G1 G2 G4 G5 G25 G26 G28 G29 H1 H2 H10 H12 H13 H14 H15 H16 H17 H18 H19 H20 H21 H27 H28 J1 J2 J4 J5 J6 J7 J12 J13 J15 J16 J18 J19 J23 J24 J25 J27 J28 J29 K1 K2 K10 K19 K21 K27 K28 L1 L2 L4 L5 L10 L15 L18 L19 L24 L25 L26 L27 L28 L29 M1 M2 M12 M14 M15 M19 M27 M28 N1 N2 N4 N5 N6 N8 N10 N16 N18 N19 N22 N23 N24 N25 N26 N27 N28 N29 P2 P3 P9 P10 P15 P16 P18 P19 P27 P28 R1 R2 R4 R5 R24 R25 R27 R28 R29 T2 T3 T16 T18 T27 T28 U1 U2 U3 U4 U5 U6 U7 U9 U10 U16 U18 V2 V3 V9 V10 V16 W2 W3 W4 W5 W6 W7 W10 Y1 Y2 Y12; UD1 A1 A2 A33 A34 AG33 AK33 AK34 AL33 AL34 AM33 AM34 AN1 AN12 AN30 AN31 AN32 AN33 AN34 AP1 AP2 AP30 AP31 AP32 AP33 AP34 B1 B34

## Via types
v1: diameter 0.406, hole 0.203, TOP to BOTTOM, 608 vias

## Routing (per net, layer and track width the routed paths; a pad name or vN(x,y) marks a point on that pad's centre or on a via; arc(x,y) is an arc through that point)
GND: length 628.9
  TOP w0.076: v1(5.16,6.82) 5.16,7.07 5.34,7.25 5.34,7.28 ; 19.17,13.34 18.85,13.02 18.79,13.02 ; 17.7,14.34 U1.AC29 ; 14.61,7.01 14.52,7.09 14.52,7.45 14.36,7.61 14.36,7.82 14.52,7.98 14.87,7.98 U1.AH16 ; U1.AA28 17.08,14.78 17.17,14.88 17.17,14.88 17.64,15.35 v1(17.67,15.35) ; U1.AJ27 19.1,11.7 18.75,11.7 18.58,11.87 18.2,11.87 18.14,11.81 ; U1.AF25 17.79,11.96 17.93,11.81 18.14,11.81 ; v1(16.31,18.43) 16.31,18.05 15.79,17.54 15.79,17.03 15.41,16.65 15.41,16.3 U1.U28 ; v1(42.43,1.89) 42.71,1.89 43,2.18 43,3.02 42.82,3.21 42.26,3.21 v1(42.12,3.07) ; 28.1,5.9 27.7,5.9 ; U1.AH3 10.36,4.09 v1(10.36,4.09) ; 43,4.8 42.93,4.73 42.79,4.73 42.59,4.53 42.59,4.35 42.54,4.3 ; 38.62,21.6 38.74,21.72 39.82,21.72 39.96,21.58 ; U1.W29 16.69,16.16 v1(16.69,16.29) 16.78,16.29 18.14,17.66 18.14,19.26 ; v1(12,3.74) 11.78,3.97 U1.AJ6 ; 41.06,5.9 41.55,5.9 ; 41.06,18.75 42.05,18.75 v1(42.05,18.75) ; v1(11.06,4.8) 11.05,4.79 10.98,4.79 U1.AG5 ; v1(44.69,0.97) 44.91,1.19 ; 18.14,11.81 U1.AH25 18.49,11.25 18.95,10.79 18.95,10.79 ; v1(18.59,10.37) 18.32,10.37 ; U1.AC27 17.08,14.08 17.34,14.34 17.44,14.34 ; U1.AJ18 16.28,8.16
  TOP w0.102: 25.11,6.4 23.89,7.61 18.5,7.61 17.61,8.5 v1(17.12,8.5) ; 25.11,6.4 25.11,6.6 25.17,6.66 25.54,6.66 25.62,6.58 25.62,6.49 25.77,6.33 26.78,6.33 v1(27.08,6.63) ; 25.11,6.4 25.11,6.38 25.26,6.24 25.41,6.24 25.73,5.92 ; 41.06,5.9 40.99,5.9 UD1.B2 ; v1(17.67,15.35) 17.77,15.35 18.51,16.09 18.76,16.09 19.71,17.04 19.71,18.38 ; 28.1,5.9 28.17,5.9 UD1.B33 ; v1(16.71,11.89) 16.69,11.87 16.64,11.87 ; v1(36.97,1.92) 37.01,1.92 37.02,1.91 40.72,1.91 41.41,1.89 ; 27.3,1.95 27.34,1.91 v1(27.95,1.91) v1(29.3,1.91) v1(32.84,1.91) 36.6,1.91 ; 18.06,14.69 18.05,14.69 17.97,14.61 ; 41.06,18.75 41.02,18.75 UD1.AN2 ; 26.02,6.79 26.23,7 26.35,7 26.43,7.08 26.55,7.08 26.78,7.3 26.78,7.6 26.5,7.88 v1(25.99,7.88) ; 27.53,5.65 27.53,5.72 27.7,5.9 ; 26.32,5.19 27.49,4.02 27.63,4.02 ; v1(19.66,10.39) 19.93,10.13 21.79,10.13 22.13,10.46 24.26,10.46 v1(24.64,10.84) 25.84,12.04 v1(26.15,12.04) 26.15,12.27 25.78,12.65 25.78,13.04 25.52,13.3 v1(25.29,13.3) 25.23,13.3 v1(23.43,11.5) ; U1.AG7 v1(11.7,5.51) ; 19.76,22.76 19.01,22.02 19.01,21.7 v1(18.9,21.58) ; UD1.B9 37.98,6.13 ; 17.97,14.61 U1.AC29 ; 17.97,14.61 17.7,14.34 17.44,14.34
  TOP w0.114: v1(17.05,7.59) 16.91,7.73 16.91,7.74 16.84,7.81 16.52,8.12 16.32,8.12 16.28,8.16 ; U1.AJ20 16.95,8.91
  TOP w0.127: U1.C6 3.16,13.37 3.26,13.47 3.26,14.05 U1.C8 3.95,14.08 v1(4.35,13.68) ; U1.AD21 15.26,11.19 v1(15.26,10.58) 15.98,10.58 U1.AF21 ; U1.C10 4.64,14.78 v1(4.65,14.8) ; U1.L23 11.03,16.94 10.4,16.94 U1.J22 ; v1(36.49,24.01) 36.16,24.34 21.35,24.34 20.61,23.59 ; U1.AG23 17.15,10.83 17.57,10.83 17.64,10.9 U1.AH24 ; 44.91,20.17 45.24,19.83 45.24,1.52 44.91,1.19 ; 16.53,21.18 v1(17.95,22.6) 17.95,22.69 20.52,25.26 36.83,25.26 36.9,25.19 ; 25.82,6.33 25.84,6.35 25.84,6.67 ; v1(18.56,14.82) 18.56,14.82 18.18,14.82 18.06,14.69 ; U1.T9 8.12,9.83 7.95,9.67 7.88,9.64 7.34,9.64 U1.R7 ; v1(16.33,10.89) 16.33,10.9 16.37,10.94 U1.AE23 ; v1(15.76,7.12) 15.76,6.96 18.1,4.62 24.63,4.62 25.67,3.58 ; v1(16.66,21.33) 16.31,20.98 v1(16.31,18.43) ; 18.14,19.26 18.14,19.55 v1(20.79,22.2) 22.05,23.45 34.74,23.45 ; v1(29.5,7.34) 29.5,7.35 29.48,7.35 29.46,7.36 28.87,7.36 28.42,6.91 UD1.D33 ; 18.95,10.79 19.12,10.79 19.17,10.75 19.27,10.64 19.41,10.64 v1(19.66,10.39) ; U1.AC24 16.02,13.33 15.98,13.37 U1.AC26 ; UD1.AN4 39.54,18.07 39.54,17.71 39.7,17.55 v1(39.7,17.4) ; UD1.R33 28.42,11.27 28.84,11.27 ; U1.R3 5.77,8.77 v1(5.74,8.8)
  TOP w0.152: v1(23.35,21.52) 23.35,21.55 23,21.9 22.15,21.9 21.8,21.55 v1(21.8,21.52) ; v1(16.86,17.38) 17.28,17.8 17.28,20 17.44,20.16 ; 27.3,1.95 25.67,3.58 ; 37.98,6.13 38.04,6.19 38.04,6.65 37.72,6.97 37.69,6.97 v1(37.66,7) ; v1(19.41,13.43) 19.26,13.43 19.17,13.34
  TOP w0.203: 11.34,16.47 U1.L21 ; 11.34,16.47 11.34,15.92 v1(11.42,15.84) ; 11.34,16.47 U1.L23 11.78,16.2 v1(11.78,16.17) ; U1.AA20 14.09,11.96 v1(14.44,11.6) ; v1(40.39,11.31) UD1.R2 ; v1(39.14,6.51) 39.18,6.47 UD1.B6 ; UD1.F2 40.13,7.71 v1(40.09,7.67) ; UD1.V2 40.43,12.51 v1(40.32,12.4) ; v1(27.12,14.24) 27.08,14.28 CD44.2 ; v1(7.88,13.78) 7.88,13.79 7.95,13.79 ; 5.35,12 5.44,12 v1(5.83,11.6) ; 5.35,12 5.7,12.35 5.73,12.35 6.04,12.66 U1.J10 ; 5.35,12 5.13,12.22 v1(5.13,12.26) 5.04,12.35 4.39,12.35 U1.G7 ; UD1.B24 31.98,6.71 32.27,7.01 v1(32.4,7.01) ; UD1.B15 35.58,6.47 v1(35.58,6.48) ; v1(29.25,12.95) 29.06,12.76 28.59,12.76 28.51,12.84 28.45,12.84 UD1.W33 ; v1(26.98,10.42) 27.33,10.07 27.94,10.07 UD1.M34 UD1.M33 29.11,10.11 29.4,9.82 29.4,9.66 v1(29.38,9.63) 29.38,9.53 29.11,9.26 28.49,9.26 28.44,9.31 UD1.K33 ; v1(33.6,17.67) 33.43,17.84 33.43,18.26 33.58,18.41 UD1.AN20 ; v1(39.47,13.71) UD1.AA2 ; UD1.AK2 40.43,17.31 v1(40.39,17.26) ; UD1.AN29 UD1.AP29 29.98,18.97 29.56,19.39 v1(29.56,19.51) ; v1(33.5,7.08) 33.18,6.76 UD1.B21 ; UD1.AN15 35.58,18.41 35.45,18.28 v1(35.45,17.92) ; UD1.AJ34 27.79,16.91 27.59,17.11 v1(27.59,17.51) ; UD1.AN24 v1(31.98,18.12) ; v1(28.78,14.24) 28.64,14.11 UD1.AB33 ; v1(15.59,11.63) 15.69,11.63 U1.AD23 ; 18.79,13.02 U1.AF28 ; v1(38.71,17.75) 38.78,17.82 UD1.AN7 ; v1(29.75,6.49) 29.58,6.32 UD1.B30 ; U1.A29 10.35,22.55 v1(10.35,22.59) ; v1(11.48,18.69) 11.48,18.61 U1.J26 ; v1(28.95,11.38) 28.84,11.27 28.8,11.31 UD1.R33 ; v1(30.78,6.48) UD1.B27 ; U1.AE19 15.24,10.47 15.24,10.56 v1(15.26,10.58) ; UD1.AD2 40.21,14.91 v1(39.8,14.5) ; UD1.B18 34.42,6.15 34.42,6.77 v1(34.27,6.92) ; v1(36.81,6.5) 36.78,6.47 UD1.B12 ; UD1.AN10 37.58,18.4 37.72,18.26 37.72,17.92 v1(37.3,17.5) ; 19.58,15.63 19.35,15.54 18.63,14.82 v1(18.56,14.82) ; v1(39.89,9.03) 40.1,8.82 40.56,8.82 40.65,8.91 UD1.J2 ; v1(12.36,11.85) 12.36,11.64 11.95,11.23 v1(11.84,11.23) ; UD1.G33 28.47,8.11 28.72,8.36 29.08,8.36 v1(29.08,8.36) ; v1(16.3,12.31) 16.3,12.29 v1(16.71,11.89) ; v1(28.78,14.97) 28.71,14.91 UD1.AD33 ; v1(40.4,10.11) 40.4,10.11 UD1.M2 ; UD1.AG2 40.43,16.11 v1(40.35,16.18) ; v1(21.89,11.67) 21.51,11.3 20.28,11.3 20.26,11.32 19.49,11.32 19.3,11.51 ; v1(30.61,18.14) 30.78,18.31 UD1.AN27 UD1.AP27 30.78,19.43 v1(30.61,19.59)
  TOP w0.254: CD18.2 CD12.2 33.89,20.08 v1(33.89,19.79) ; CD47.2 30.99,3.81 CD50.2 31.75,3.78 CD51.2 31.79,3.07 v1(31.7,2.98) v1(31.13,2.98) ; U1.U12 9.31,10.19 v1(9.24,10.19) 9.24,10.15 9.6,9.8 v1(9.64,9.8) 9.64,9.82 U1.V12 ; U1.U12 9.3,10.9 ; U1.U12 U1.V12 ; U1.U12 9.95,10.84 ; U1.P11 8.62,10.87 ; U1.P11 8.2,11.25 v1(7.9,11.55) ; U1.P11 v1(8.63,11.64) ; 8.62,10.87 8.87,10.62 v1(8.87,10.55) ; 8.62,10.87 8.62,10.87 v1(8.97,11.22) 8.99,11.24 8.99,11.26 9.33,11.59 ; v1(10.69,10.87) 10.36,10.54 U1.V13 ; v1(10.69,10.87) 11.01,10.54 U1.W14 ; v1(10.69,10.87) 11.07,11.25 U1.V15 ; 6.12,11.25 U1.L7 ; 6.12,11.25 6.46,10.91 6.54,10.91 v1(6.58,10.91) ; 6.12,11.25 6.12,11.32 v1(5.83,11.6) 6.12,11.89 U1.K9 ; 6.12,11.25 6.17,11.25 ; U1.L7 U1.L6 ; U1.L7 6.03,10.63 v1(6.19,10.63) ; v1(34.8,3.31) 34.82,3.33 ; v1(34.8,3.31) 34.79,3.33 34.73,3.33 ; v1(34.8,3.31) 34.2,3.31 v1(34.19,3.33) 34.27,3.41 CD11.2 33.53,3.83 CD38.2 ; 34.82,3.33 35.45,3.33 35.89,3.76 36.31,3.76 ; 34.82,3.33 35,3.51 CD53.2 ; 10.34,11.98 10.11,11.74 v1(10.11,11.46) 9.86,11.46 v1(9.64,11.24) ; 10.34,11.98 U1.R15 ; 10.34,11.98 U1.U15 ; 9.33,11.59 9.32,11.59 v1(9.29,11.61) ; 9.33,11.59 9.33,11.58 U1.T13 ; 37.02,3.76 37.02,3.54 37.28,3.28 v1(37.43,3.28) ; 37.02,3.76 37.2,3.76 37.45,4.02 37.45,4.49 v1(37.82,4.86) ; 37.02,3.76 36.31,3.76 ; U1.T13 9.67,11.25 10.04,10.87 ; U1.T13 9.3,10.9 ; U1.L13 7.89,13.01 ; U1.L13 v1(7.53,13.37) ; U1.L13 7.9,13.02 v1(8.27,13.39) ; 7.89,13.01 v1(7.55,12.67) 7.5,12.67 v1(7.16,12.32) ; 7.89,13.01 7.89,12.93 v1(8.2,12.62) ; RD10.1 27.27,17.11 27.59,17.11 ; v1(8.65,8.74) 8.95,8.44 U1.W8 U1.W9 ; 8.99,12.65 8.96,12.68 9.29,13.02 U1.N15 ; 8.99,12.65 v1(8.89,12.65) 8.6,12.35 U1.N13 U1.N12 ; 8.99,12.65 9.26,12.37 ; v1(8.87,10.55) 8.87,10.46 U1.T10 U1.T9 ; v1(8.87,10.55) 8.96,10.55 9.3,10.9 ; 27.53,5.65 27.53,5.31 v1(27.71,5.13) 27.77,5.07 CD17.2 ; U1.M9 U1.M10 7.29,11.71 7.74,11.71 v1(7.9,11.55) ; U1.M9 6.83,11.2 6.58,10.95 v1(6.58,10.91) ; U1.M9 U1.L9 ; v1(12.05,14.41) 12.01,14.41 11.71,14.1 11.77,14.04 11.77,13.57 11.78,13.56 U1.T19 U1.U19 ; v1(12.05,14.41) 12.78,15.14 U1.R23 ; v1(12.05,14.41) 11.42,15.03 U1.N21 U1.M21 ; U1.AG13 U1.AG12 13.1,7.01 v1(12.79,7.32) ; U1.AG13 U1.AF13 ; U1.AG13 U1.AG14 13.57,8.04 v1(13.52,8.04) 13.2,7.71 U1.AF13 ; U1.AA11 10.64,8.77 v1(9.99,9.43) ; v1(7.53,13.37) 7.88,13.71 v1(7.88,13.78) 7.95,13.78 7.95,13.79 U1.K15 U1.K16 ; v1(7.53,13.37) 7.18,13.02 U1.K12 ; 10.36,9.83 10.69,10.16 10.69,10.24 v1(10.71,10.26) ; v1(9.65,14.08) v1(10.01,14.44) ; v1(9.65,14.08) 9.3,13.74 U1.M16 U1.L16 ; v1(9.65,14.08) v1(10.01,13.72) v1(10.37,13.36) ; v1(9.65,14.08) v1(9.29,14.44) ; v1(10.43,20.46) 10.09,20.12 v1(9.99,20.12) ; v1(10.43,20.46) 10.72,20.17 U1.E27 11.05,19.75 v1(11.08,19.75) 11.08,19.73 U1.G27 ; v1(10.43,20.46) 10.09,20.79 U1.C27 U1.C26 ; U1.AF28 U1.AE28 U1.AD28 17.58,13.52 v1(17.45,13.52) 17.29,13.52 U1.AC27 U1.AC26 ; v1(9.29,11.61) 9.29,11.76 v1(9.59,12.05) ; v1(9.29,11.61) U1.P13 ; CD49.2 26.05,8.99 ; CD49.2 25.99,8.31 v1(25.99,7.88) ; CD49.2 26.05,8.33 26.02,8.31 25.94,8.31 25.55,8.7 25.55,8.91 ; 26.05,8.99 25.62,8.99 25.55,8.91 ; 26.05,8.99 26.05,8.99 CD46.2 ; 36.31,3.76 36.31,3.49 36.44,3.36 v1(36.44,3.32) ; v1(12.67,12.21) 12.66,12.21 12.36,11.91 ; v1(12.67,12.21) 12.67,12.48 U1.V19 ; v1(12.67,12.21) 12.8,12.35 12.83,12.35 12.96,12.48 13.03,12.48 13.09,12.54 v1(13.23,12.68) 13.09,12.68 12.83,12.95 v1(12.83,13) 12.83,13.03 U1.U20 U1.U19 ; U1.K9 6.12,11.96 U1.L9 ; U1.K9 U1.H9 5.41,12.54 v1(5.13,12.26) ; U1.AA19 U1.AA20 13.96,11.9 14.63,11.9 14.93,11.6 ; U1.AA19 U1.AA18 ; U1.AA19 13.55,11.18 ; 13.55,11.18 13.48,11.25 U1.AA18 ; 13.55,11.18 v1(13.55,10.98) ; U1.R15 9.75,12.05 v1(9.59,12.05) ; U1.R15 U1.R16 ; 9.26,12.37 8.95,12.06 U1.P13 ; 9.26,12.37 v1(9.59,12.05) ; v1(43.92,13.04) 43.89,13.07 43.44,13.07 ; U1.W1 6.18,5.95 6.12,6.01 6.05,6.01 v1(6,6.07) ; 14.93,11.6 v1(14.44,11.6) ; 14.93,11.6 U1.AC21 ; 9.95,10.84 v1(10.01,10.84) ; 9.95,10.84 9.99,10.87 10.04,10.87 ; v1(10.01,10.84) 10.31,10.54 U1.V13 ; v1(10.01,10.84) 10.04,10.87 ; v1(8.93,14.8) v1(9.29,14.44) ; v1(8.93,14.8) 8.9,14.8 v1(8.58,15.13) ; v1(8.93,14.8) 8.6,14.46 U1.K16 ; v1(8.93,14.8) 9.27,15.14 U1.K18 ; v1(9.29,14.44) 8.95,14.1 U1.L16 ; v1(11.4,10.93) 11.07,10.59 U1.W14 ; v1(11.4,10.93) 11.08,11.25 U1.V15 ; v1(11.4,10.93) 11.4,10.96 11.68,11.23 v1(11.84,11.23) ; U1.AA18 U1.AA17 ; 9.3,10.9 U1.T12 8.67,11.52 8.67,11.6 v1(8.63,11.64) ; 15.98,13.37 v1(15.98,13.37) 15.67,13.68 U1.AA25 15.67,13.85 15.09,14.43 U1.W25 ; U1.U15 10.4,11.29 10.4,11.23 ; U1.U15 U1.V15 ; U1.C25 U1.C24 U1.E24 U1.G24 ; U1.C25 9.3,20.05 v1(9.63,19.72) 9.99,20.09 v1(9.99,20.12) ; U1.C25 U1.C26 ; U1.AE15 v1(13.86,9.09) 13.91,9.13 U1.AE17 14.25,9.57 14.51,9.82 v1(14.59,9.82) 14.59,9.91 14.87,10.19 U1.AE19 ; v1(43.9,11.72) 43.44,11.72 ; U1.V12 U1.W12 ; U1.V12 U1.V13 ; U1.V19 U1.V18 12.13,12.13 12.36,11.91 ; U1.V19 U1.U19 ; U1.G24 U1.G23 ; U1.G24 10.36,18.28 v1(10.69,17.96) ; v1(41.9,19.97) 41.66,19.97 41.44,20.18 41.34,20.18 ; 43.44,10.07 v1(43.88,10.07) ; v1(20.35,12.44) 20.31,12.44 20.18,12.31 U1.AJ29 ; U1.AF11 12.49,7.01 v1(12.79,7.32) ; CD45.2 27.04,13.11 v1(27.04,13.11) ; 19.71,18.38 21.85,20.52 21.85,21.47 v1(21.8,21.52) ; v1(10.16,17.31) U1.J22 10.34,16.91 9.72,16.28 v1(9.66,16.28) ; 31.12,2.99 30.52,3.59 30.16,3.59 29.94,3.36 ; v1(7.9,11.55) 7.9,11.61 U1.N12 ; 10.4,11.23 v1(9.59,12.05) ; 10.4,11.23 10.04,10.87 ; U1.M21 U1.L21 ; U1.M21 v1(11.42,15.84) ; U1.L9 6.47,11.42 v1(6.24,11.19) ; U1.J10 6.12,12.75 v1(6.42,13.05) 6.12,13.35 U1.H11 ; U1.C3 1.52,12.26 v1(1.83,11.95) 2.18,11.6 U1.E3 2.23,11.55 v1(2.53,11.25) 2.59,11.25 U1.G3 ; v1(26.74,5.13) 26.73,5.13 26.62,5.13 26.57,5.19 26.32,5.19 25.73,5.78 CD48.2 25.73,6.12 v1(25.36,6.49) ; U1.C26 9.66,20.44 v1(9.99,20.12) ; v1(10.35,22.59) 10.36,22.58 U1.B29 ; v1(43.79,15.83) 43.35,15.83 ; 18.32,10.37 U1.AJ24 U1.AH24 U1.AH25 ; v1(10.71,10.26) 10.79,10.26 U1.W14 ; v1(10.71,10.26) 10.62,10.26 10.36,10.52 U1.V13 ; v1(43.68,17.03) 43.25,17.03 ; U1.N12 8.56,11.64 8.56,11.64 8.6,11.61 v1(8.63,11.64) ; v1(16.3,12.31) 16.32,12.31 ; 16.32,12.31 16.36,12.35 16.46,12.35 v1(16.69,12.58) ; 16.32,12.31 16.36,12.34 ; U1.A1 U1.A2 0.44,12.66 v1(0.18,12.93) ; 16.95,8.91 16.95,8.67 v1(17.12,8.5) ; v1(8.63,11.64) U1.P13 ; U1.AJ1 v1(10.01,1.92) ; v1(13.61,16.57) 13.9,16.28 13.9,16.2 U1.R26 13.98,16.2 v1(14.32,15.86) 14.61,15.57 U1.U26 ; U1.N3 5.01,8.77 v1(4.66,9.13) 4.35,9.43 U1.L3 4.3,9.48 v1(3.95,9.83) 3.65,10.13 U1.J3 3.59,10.19 v1(3.24,10.54) ; U1.AD7 10.36,6.46 v1(10.66,6.76) ; v1(6.58,10.91) 6.3,10.63 v1(6.19,10.63) ; U1.L16 U1.K16 ; v1(43.88,10.7) 43.44,10.7 ; v1(41.65,5.87) 41.57,5.87 41.55,5.9 ; v1(21.83,16.95) 21.68,16.95 21.59,17.04 20.98,17.04 ; v1(43.87,12.44) 43.87,12.43 43.44,12.43 ; 25.55,8.91 25.55,8.94 v1(25.55,8.94) ; 24.16,3.38 23.96,3.58 17.92,3.58 15.42,6.08 15.4,6.08 v1(15.39,6.09) 15.17,6.31 15.17,6.36 14.61,6.92 14.61,7.01 ; 24.16,3.38 19.58,3.38 v1(19.49,3.47) 17.7,3.47 v1(17.61,3.57) ; 24.16,3.38 26.79,0.75 41.04,0.75 ; v1(6.19,10.63) 6.47,10.34 U1.N7 ; U1.D12 v1(5.39,15.46) ; v1(12.79,7.32) U1.AF13 ; 19.3,11.51 U1.AJ27 ; 12.36,11.91 v1(12.36,11.85) ; v1(43.65,17.94) 43.19,17.94 ; v1(16.7,10.51) 16.7,10.52 v1(16.33,10.89) 16.33,10.85 U1.AF21 U1.AG21 v1(16.7,10.51) ; v1(16.7,10.51) 17.03,10.19 U1.AH22 ; v1(16.7,10.51) U1.AG23 ; U1.AC21 U1.AC24 16.29,12.39 16.33,12.39 16.38,12.34 16.36,12.34 ; U1.AC21 U1.AD21 15.31,11.35 v1(15.59,11.63) ; 20.98,17.04 19.58,15.63 ; 20.98,17.04 20.98,18 23.3,20.32 23.3,21.47 v1(23.35,21.52) ; U1.AH10 U1.AJ11 13.55,5.22 v1(13.53,5.2) ; 16.36,12.34 16.28,12.34 16.02,12.08 U1.AD23 U1.AE23 16.66,11.89 v1(16.71,11.89) 16.78,11.96 U1.AF25 ; v1(12.5,9.08) 12.44,9.08 U1.AC13 11.8,8.44 v1(11.72,8.44) ; 42.64,18.75 42.64,19.84 CD42.2 43.33,19.85 v1(43.39,19.79) 43.39,19.59 v1(43.64,19.33) ; UD1.AN17 34.78,18.5 34.78,17.58 35.12,17.24 v1(35.12,16.63) ; v1(42.09,8.82) 42.37,8.82 42.84,8.35 43.15,8.35 ; v1(8.97,7.77) 8.93,7.77 v1(8.59,7.43) 8.95,7.07 U1.AA6 U1.AA7 ; v1(4.36,11.64) 4.05,11.96 U1.G6 ; U1.R7 U1.R6 6.83,9.22 v1(6.49,9.55) ; v1(29.64,2.99) 29.51,3.12 29.42,3.12 29.02,3.52 ; v1(23.43,11.5) 23.31,11.62 21.94,11.62 v1(21.89,11.67) ; UD1.AJ33 UD1.AJ34
  TOP w0.305: v1(28.66,3) 28.66,3.22 ; 28.66,3.22 28.66,3.22 28.22,3.66 27.99,3.66 27.63,4.02 27.63,4.22 ; 28.66,3.22 28.97,3.52 29.29,3.52 29.64,3.17 29.64,3.07
  TOP w0.381: 43.72,8.17 43.72,9.91 v1(43.88,10.07) ; 43.72,8.17 v1(43.88,8.01) v1(43.88,6.76) ; 43.72,8.17 43.54,8.35 43.15,8.35 ; v1(42.05,18.75) 42.64,18.75 42.86,18.96 ; 27.63,4.22 27.63,4.53 27.71,4.62 v1(27.71,5.13) ; v1(31.13,2.98) 31.13,2.98 31.12,2.99 30.31,2.99 29.94,3.36 29.64,3.07 v1(29.64,2.99) ; v1(43.66,18.75) 43.08,18.75 42.86,18.96 ; 42.86,18.96 43.11,19.21 43.52,19.21 v1(43.64,19.33)
  TOP w0.406: CD37.2 26.75,10.42 v1(26.98,10.42)
  ART02 w0.076: 31.36,4.66 31.38,4.67 31.38,4.93 31.39,4.94 31.39,5.05 31.36,5.08
  ART03 w0.076: v1(20.2,24.87) 20.2,24.9 20.64,25.34 37.6,25.34 37.69,25.26 37.97,24.98 v1(38.26,24.98) ; v1(13.86,9.09) 13.86,8.85 13.82,8.81 13.82,8.5 14.62,7.7 14.62,6.78 15.23,6.18 15.29,6.18 15.38,6.09 v1(15.39,6.09)
  ART03 w0.127: v1(38.96,0.22) 38.82,0.08 35.33,0.08 v1(35.25,0.16) 35.17,0.08 31.35,0.08 v1(31.27,0.17) 31.15,0.05 27.87,0.05 v1(27.76,0.16) 27.66,0.06 24.53,0.06 21.46,3.14 19.82,3.14 v1(19.49,3.47) ; 42.12,3.08 42.38,3.35 43.42,3.35 v1(43.73,3.66) 43.88,3.81 43.88,5.94 ; v1(43.43,21.65) v1(42.53,22.54) v1(41.63,23.44) v1(40.73,24.34) 40.1,24.98 v1(39.71,24.98) 38.95,24.98 v1(38.91,25.02) 38.87,24.98 v1(38.26,24.98)
  ART03 w0.152: v1(20.2,24.87) 20.12,24.87 19.49,24.23
  ART03 w0.178: v1(17.95,22.6) 17.95,22.69 19.49,24.23 ; v1(16.31,18.43) 16.31,18.39 15.21,17.29
  ART03 w0.203: v1(14.32,15.86) 15.21,16.75 15.21,17.29
  ART03 w0.254: v1(17.95,22.6) 17.86,22.6 16.66,21.41 v1(16.66,21.33) 16.57,21.33 16.31,21.08 v1(16.31,18.43) ; v1(15.39,6.09) 15.39,5.78 v1(17.61,3.57) 19.39,3.57 v1(19.49,3.47) ; 42.12,3.08 v1(42.12,3.07) 41.83,3.07 38.98,0.22 v1(38.96,0.22) ; v1(43.88,8.01) 43.88,8.01 43.88,6.77 v1(43.88,6.76) 43.88,5.94 ; v1(43.43,21.65) 43.39,21.6 v1(43.39,19.79) 43.39,19.59 v1(43.64,19.33) 43.66,19.31 43.66,18.75 v1(43.66,18.75) 43.66,17.95 v1(43.65,17.94) 43.65,16.41 v1(43.63,16.4) 43.63,15.99 v1(43.79,15.83) 43.79,13.17 v1(43.92,13.04) 43.87,13 v1(43.87,12.44) 43.9,12.41 v1(43.9,11.72) 43.9,10.72 v1(43.88,10.7) v1(43.88,10.07)
  ART03 w0.381: v1(43.88,8.01) 44.03,7.87 44.47,7.87 44.77,8.17 44.77,9.17 v1(43.88,10.07)
  ART04 w0.076: 20.15,25.2 20.22,25.27 37.69,25.27 37.78,25.17
  ART04 w0.254: v1(14.32,15.86) 14.32,16.39 15.01,17.08 15.01,17.15 15.22,17.36 ; v1(17.95,22.6) 17.75,22.6 16.66,21.52 v1(16.66,21.33) 16.47,21.33 16.31,21.16 16.31,20.33 ; 16.87,12.05 v1(16.71,11.89) 15.85,11.89 v1(15.59,11.63)
  ART05 w0.076: 31.39,4.95 31.37,4.93 31.37,4.65 31.36,4.65 31.36,4.57 31.39,4.54
  BOTTOM w0.076: v1(42.12,3.07) 42.28,3.23 43.3,3.23 v1(43.73,3.66) ; 13.04,14.4 13.28,14.4 13.28,14.4
  BOTTOM w0.102: 44.78,14.42 44.93,14.26 ; v1(43.88,8.01) v1(43.88,10.07)
  BOTTOM w0.127: 44.89,2.23 45.38,2.72 45.38,9.93 44.93,10.38 44.93,14.26 ; v1(43.88,10.07) v1(43.88,10.7) 43.88,11.7 v1(43.9,11.72) 43.9,12.41 v1(43.87,12.44) 43.92,12.48 v1(43.92,13.04) ; v1(43.88,8.01) 43.88,6.94 ; v1(42.43,1.89) 43.32,1.89 44.66,3.22 44.66,5.81 43.88,6.59 v1(43.88,6.76)
  BOTTOM w0.152: 42.37,15.02 42.12,14.56 41.8,14.45 41.4,14.31 40.99,14.12 40.64,14.01 40.5,13.98 ; 39.62,14.06 v1(39.8,14.5) ; 39.62,14.06 39.95,14 ; 39.62,14.06 v1(39.47,13.71) 39.64,13.77 ; v1(39.8,14.5) 39.64,13.77 ; v1(39.8,14.5) 39.96,14.1 ; v1(39.8,14.5) 39.92,13.86 ; v1(39.8,14.5) 39.8,13.83 ; v1(36.97,1.92) 36.99,1.94 42.38,1.94 v1(42.43,1.89) ; 39.64,13.77 39.8,13.83 ; 40.5,13.98 40.28,13.95 ; 40.5,13.98 39.95,14 ; 40.28,13.95 39.95,14 ; 40.28,13.95 39.69,14.23 ; 40.28,13.95 39.92,13.86 ; 39.8,13.83 39.92,13.86
  BOTTOM w0.203: CD40.2 41.13,6.04 41.29,5.87 v1(41.65,5.87) 41.67,5.9 CD14.2 ; CD13.2 26.01,9.36 25.59,8.94 v1(25.55,8.94) ; CD43.2 40.93,17.35 40.87,17.35 ; CD15.2 27.39,14.24 v1(27.12,14.24) 27.12,14.25 CD35.2 ; CD52.2 38.81,6.17 v1(39.14,6.51) ; v1(28.78,14.97) 28.61,15.14 RD11.1 ; v1(36.97,1.92) 35.65,1.92 34.8,2.77 v1(34.8,3.31) ; v1(40.09,7.67) 40.39,7.67 CD34.2 ; 27.32,3 28.33,3 28.36,3.04 28.91,3.04 28.97,2.98 29.24,2.98 29.33,2.88 29.85,2.88 29.94,2.98 31.13,2.98 v1(31.13,2.98) v1(31.7,2.98)
  BOTTOM w0.254: v1(27.59,17.51) 27.61,17.49 27.61,17.32 CD36.2 ; v1(28.78,14.97) 28.78,14.64 CD24.2 28.83,14.59 28.83,14.49 28.78,14.43 v1(28.78,14.24) ; v1(28.95,11.38) 28.92,11.34 CD33.2 ; CD16.2 27.93,5.35 v1(27.71,5.13) ; CD23.2 34.43,16.53 34.52,16.63 v1(35.12,16.63) 35.34,16.85 RD8.1 35.34,17.82 v1(35.45,17.92) ; v1(29.38,9.63) 29.34,9.67 CD41.2 ; v1(29.75,6.49) 29.47,6.22 CD39.2 ; CD22.2 37.45,17.66 v1(37.3,17.5) 36.97,17.18 RD2.1 ; v1(34.8,3.31) 34.79,3.33 v1(34.19,3.33) ; v1(37.43,3.28) 37.83,3.68 40.4,3.68 41.01,3.07 v1(42.12,3.07) ; CD10.2 35.68,20.15 v1(35.9,19.92) ; CD21.2 28.67,17.51 29.17,17.51 v1(29.23,17.45) ; CD7.2 15.7,13.65 v1(15.98,13.37) ; 40.87,17.35 40.51,17.35 40.42,17.26 v1(40.39,17.26) 39.84,17.26 v1(39.7,17.4) ; v1(31.98,18.12) 31.66,18.44 CD67.2 ; v1(30.61,19.59) 30.58,19.56 30.58,19.03 CD68.2 ; v1(43.88,6.76) 43.88,6.94 44.24,7.31 CD25.2 ; v1(43.88,8.01) 43.9,8.03 RD9.1
  BOTTOM w0.381: v1(43.88,10.07) 44.27,9.68 CD26.2
  vias: v1(1.81,9.29) v1(2.04,7.64) v1(3.62,10.92) v1(3.99,11.29) v1(4.33,10.21) v1(4.53,17.67) v1(4.72,13.33) v1(4.7,10.59) v1(4.81,11.98) v1(5.03,14.42) v1(5.04,10.94) v1(5.03,9.5) v1(5.13,13.02) v1(5.42,14.03) v1(5.41,11.9) v1(5.45,11.26) v1(5.76,15.09) v1(5.85,13.72) v1(6.03,18.98) v1(6.09,16.2) v1(6.13,14.7) v1(6.12,9.17) v1(6.45,8.09) v1(6.47,15.82) v1(6.52,14.39) v1(6.78,16.9) v1(6.81,15.42) v1(6.77,12.68) v1(6.82,8.47) v1(7.15,16.53) v1(7.15,7.38) v1(7.19,15.08) v1(7.21,10.86) v1(7.22,8.86) v1(7.27,10) v1(7.41,20.51) v1(7.55,16.17) v1(7.52,14.14) v1(7.52,7.74) v1(7.68,9.19) v1(7.86,17.24) v1(7.91,15.8) v1(7.87,10.13) v1(7.88,8.11) v1(7.86,6.67) v1(8.13,9.36) v1(8.19,18.32) v1(8.23,10.49) v1(8.24,7.05) v1(8.26,16.84) v1(8.28,8.4) v1(8.44,21.79) v1(8.56,16.41) v1(8.57,17.94) v1(8.57,5.97) v1(8.6,0.65) v1(8.86,4.88) v1(8.9,19.03) v1(8.95,6.34) v1(9.17,17.11) v1(9.27,18.65) v1(9.28,5.26) v1(9.47,8.02) v1(9.63,17.57) v1(9.65,5.64) v1(9.58,4.19) v1(9.94,15.86) v1(9.98,4.55) v1(10.33,19.02) v1(10.35,7.68) v1(10.36,4.93) v1(10.36,15.43) v1(10.7,19.41) v1(10.82,16.53) v1(10.77,15.02) v1(10.91,7.81) v1(10.93,2.42) v1(11.05,18.35) v1(10.97,13) v1(11.31,13.45) v1(11.28,12.59) v1(11.44,17.23) v1(11.67,12.23) v1(11.82,17.6) v1(11.87,11.75) v1(12.06,8.06) v1(12.15,16.52) v1(12.09,9.46) v1(12.2,17.96) v1(12.53,16.9) v1(12.9,17.27) v1(13.55,4.31) v1(14.42,3.38) v1(14.64,14.79) v1(18.32,6.59) v1(19.06,4.67) v1(19.6,2.42) v1(20.28,15.04) v1(20.59,19.95) v1(20.68,13.61) v1(21.29,12.25) v1(21.28,4.68) v1(22.04,14.69) v1(22.29,6.66) v1(22.96,14.34) v1(23.39,6.55) v1(23.49,12.45) v1(23.82,22.11) v1(23.81,15.25) v1(24.62,15.81) v1(25.01,5.09) v1(25.26,17.75) v1(25.88,20.75) v1(26.44,3.04) v1(26.58,15.02) v1(26.94,22.13) v1(30.56,16.3) v1(31.18,15.76) v1(31.7,15.24) v1(32.19,14.74) v1(32.74,14.28) v1(33.06,22.27) v1(33.4,13.59) v1(34.29,12.63) v1(34.83,22.2) v1(34.82,12.11) v1(35.32,10.85) v1(35.47,22.97) v1(36.12,10.26) v1(36.88,21.23) v1(37.24,10.34) v1(37.42,9.51) v1(37.59,20.42) v1(37.94,8.98) v1(38.47,8.45) v1(39.22,23.83) v1(40.07,20.94) v1(40.09,19.89) v1(40.4,22.78) v1(41.89,20.52) v1(42.4,4.06) v1(43.98,0.37) v1(44.32,20.75)
VCC-DRAM: length 99
  TOP w0.152: UD1.C34 27.86,6.39 27.77,6.39 27.52,6.13 27.07,6.13 ; UD1.A16 35.18,5.42 35.33,5.26 35.33,4.59 v1(35.3,4.55) ; 13.55,13.03 U1.W21 13.9,12.66 U1.Y21
  TOP w0.203: UD1.A23 32.38,5.71 32.38,5.01 32.23,4.87 v1(32.23,4.76) 32.23,4.6 31.95,4.31 CD51.1 31.74,4.31 ; 27.98,13.72 27.98,14.1 UD1.AB34 ; 27.98,13.72 27.97,13.73 v1(27.21,13.73) ; 27.98,13.72 UD1.AA34 ; v1(42.18,17.01) 42.11,16.95 41.21,16.95 UD1.AJ1 ; v1(27.56,15.31) UD1.AE34 ; 41.8,14.48 41.21,14.48 UD1.AC1 41.18,14.48 ; v1(33.38,19.76) 33.38,19.22 33.58,19.02 UD1.AP20 ; UD1.AP6 39.18,19.06 39.4,19.29 39.4,19.76 39.1,20.07 v1(39.01,20.07) ; v1(35.89,19.4) 35.98,19.31 UD1.AP14 ; UD1.W34 27.94,12.87 27.37,12.87 27.21,12.71 26.83,12.71 CD45.1 26.64,12.61 26.36,12.9 26.36,13.39 26.75,13.78 CD44.1 ; UD1.A13 36.38,4.9 v1(36.27,4.79) ; 42.42,15.71 41.56,15.71 v1(41.56,15.71) UD1.AF1 ; UD1.A32 28.78,5.14 v1(28.79,5.12) ; UD1.AP3 40.38,19.01 40.59,19.23 40.59,19.98 CD27.1 40.79,20.02 41.37,19.44 v1(41.91,19.44) ; 42.32,10.49 42.31,10.49 41.2,10.49 UD1.N1 ; UD1.A29 29.98,5.02 v1(29.89,4.93) ; UD1.W1 41.98,12.91 v1(42.16,12.73) ; v1(38.78,5.21) 38.78,5.22 UD1.A7 ; v1(41.66,6.39) 41.57,6.39 41.45,6.51 UD1.C1 ; UD1.AP11 37.18,19.64 v1(37.29,19.75) ; v1(42.05,18.11) UD1.AM1 UD1.AL1 ; v1(27.55,11.31) UD1.R34 ; v1(40.43,5.2) 40.43,5.66 UD1.A3 ; UD1.AP28 30.38,19.25 v1(30.1,19.53) ; CD59.1 UD1.T1 ; v1(41.7,8.12) 41.69,8.11 UD1.G1 ; UD1.A20 33.58,5.57 33.45,5.45 33.45,4.99 33.67,4.77 v1(33.67,4.76) ; UD1.A10 UD1.A11 37.25,5.64 37.25,5.09 36.88,4.72 v1(36.79,4.72) ; UD1.A26 31.22,5.67 31.22,4.99 v1(31.02,4.8) ; UD1.AP24 v1(31.98,19.4) ; UD1.AH34 v1(27.54,16.51) ; v1(27.52,10.51) UD1.N34
  TOP w0.254: U1.Y15 U1.Y14 11.42,10.16 11.67,9.92 v1(11.67,9.79) 12.14,10.26 v1(12.14,10.28) ; U1.Y15 U1.Y16 ; U1.Y15 12.04,10.28 v1(12.14,10.28) ; CD30.1 42.89,10.7 42.89,11.26 ; CD30.1 42.49,10.67 v1(42.38,10.55) 42.32,10.49 ; CD30.1 42.87,10.09 CD31.1 42.89,9.92 v1(42.65,9.67) ; U1.Y16 U1.Y17 12.49,11.28 v1(12.8,11.6) 13.16,11.96 U1.Y19 13.58,12.35 v1(13.66,12.35) 13.66,12.42 U1.Y21 ; U1.Y16 12.15,10.9 12.45,10.59 v1(12.51,10.59) 12.19,10.28 v1(12.14,10.28) ; 14.25,12.93 14.2,12.93 13.93,12.66 U1.Y21 ; 14.25,12.93 13.94,13.24 v1(13.94,13.29) 13.92,13.29 ; 14.25,12.93 v1(14.27,12.93) 14.27,13 14.65,13.38 v1(14.65,13.4) ; UD1.AP26 v1(31.18,19.52) ; CD37.1 26.62,9.56 v1(27.06,9.56) ; 42.89,11.26 CD59.1 42.89,12.43 CD29.1 42.84,12.43 42.81,12.46 42.75,12.46 42.68,12.53 42.45,12.53 42.41,12.57 42.39,12.59 42.25,12.73 v1(42.16,12.73) ; 42.89,11.26 v1(42.57,11.26) ; UD1.K34 UD1.L34 27.33,9.71 27.18,9.56 v1(27.06,9.56) ; U1.U21 12.91,13.72 13.2,14.01 ; U1.U21 U1.V21 ; U1.U21 U1.T21 ; CD48.1 26.72,5.92 v1(26.79,5.85) 27.07,6.13 ; 13.92,13.29 13.81,13.29 13.55,13.03 U1.W21 ; 13.92,13.29 v1(13.43,13.78) ; CD55.1 37.02,4.49 v1(36.79,4.72) ; CD50.1 30.99,4.31 CD47.1 30.17,4.43 CD17.1 28.77,4.85 28.77,4.88 ; U1.V21 U1.W21 ; U1.V21 13.19,13.53 v1(13.43,13.78) ; UD1.AP18 UD1.AP17 34.78,19.73 v1(34.75,19.75) 34.78,19.78 CD18.1 ; CD54.1 36.31,4.75 v1(36.27,4.79) ; 42.42,15.71 42.68,15.71 CD57.1 CD58.1 42.79,15.18 42.5,15.18 41.8,14.48 ; UD1.AB1 41.18,14.48 ; 13.2,14.01 v1(13.43,13.78) ; 13.2,14.01 U1.T22 U1.T21 ; CD12.1 33.17,20.16 33.38,19.96 v1(33.38,19.76) ; U1.W21 U1.Y21 ; CD44.1 27.16,13.78 v1(27.21,13.73) ; U1.T21 U1.T20 ; v1(22.37,17.45) 22.37,17.67 CD1.1 ; v1(35.3,4.55) 35.24,4.55 CD53.1 34.98,4.33 CD11.1 34.11,4.33 v1(33.67,4.76) 33.48,4.57 CD38.1 ; v1(42.28,10.04) 42.36,9.95 42.37,9.95 v1(42.65,9.67) ; v1(42.65,9.67) 42.55,9.58 41.42,9.58 41.29,9.71 UD1.L1 UD1.K1 ; v1(42.05,18.11) 42.05,18.08 42.19,17.94 CD28.1 ; UD1.A19 UD1.A20 ; v1(27.06,9.56) 26.93,9.43 26.93,9.43 26.55,9.05 CD46.1 26.55,8.37 CD49.1 26.7,8.37 v1(26.99,8.08) 26.99,7.9 27.28,7.6 27.81,7.6 27.91,7.71 UD1.F34 ; UD1.AP11 UD1.AP10 ; v1(42.18,17.01) 42.21,17.01 42.22,17.03 CD56.1 ; 38.61,20.42 38.84,20.42 v1(39.01,20.59) 39.01,20.59 39.01,20.58 v1(39.01,20.07) ; UD1.A32 UD1.A31
  TOP w0.305: 38.78,20.82 v1(39.01,20.59) 39.24,20.83 CD8.1 39.16,21.19 38.78,20.82 ; 38.78,20.82 CD19.1 38.32,20.71 38.89,20.14 38.94,20.14 v1(39.01,20.07) ; 31.38,4.31 31.74,4.31 ; 31.38,4.31 31.02,4.67 ; 31.38,4.31 30.7,4.31 ; 30.48,4.26 30.43,4.31 29.41,4.31 ; 30.48,4.26 30.65,4.26 30.7,4.31 ; 30.48,4.26 30.21,4.26 29.89,4.58 29.89,4.79 ; 30.7,4.31 31.02,4.64 31.02,4.67 ; 29.89,4.79 29.41,4.31 ; 29.89,4.79 v1(29.89,4.93) ; 29.41,4.31 29.33,4.31 ; 31.02,4.67 v1(31.02,4.8) ; 29.33,4.31 28.77,4.88 28.77,5.1 v1(28.79,5.12) 28.79,4.91 29.33,4.36 29.33,4.31
  TOP w0.381: v1(43.05,14.69) 42.8,14.94 CD58.1
  ART03 w0.076: 32.09,15.12 31.85,14.87 31.85,14.85 ; 34.32,12.13 34.15,11.96 34.15,11.95 34.09,11.9 ; 32.39,14.41 32.39,14.44 32.6,14.64
  BOTTOM w0.203: v1(27.06,9.56) 27.05,9.57 CD13.1
  BOTTOM w0.254: v1(31.98,19.4) 31.88,19.29 31.88,19.27 CD67.1 31.18,19.31 v1(31.18,19.52) ; v1(27.56,15.31) 27.54,15.28 CD15.1 ; v1(27.55,11.31) 27.59,11.34 CD33.1 ; CD34.1 41.54,7.96 v1(41.7,8.12) ; v1(35.89,19.4) 35.67,19.4 ; 35.67,19.4 35.42,19.65 CD10.1 ; 35.67,19.4 RD6.2 ; v1(41.66,6.39) 41.66,6.4 CD14.1 ; v1(26.79,5.85) 26.89,5.75 CD16.1 ; CD52.1 38.81,5.24 v1(38.78,5.21) ; CD68.1 30.03,19.46 v1(30.1,19.53) ; v1(27.21,13.73) 27.19,13.75 CD35.1 ; CD36.1 27.56,16.65 27.54,16.63 v1(27.54,16.51) ; v1(44.24,8.59) 44.28,8.63 RD5.2 ; CD9.1 41.97,19.51 v1(41.91,19.44)
